# EAGLE board Client_Tally-NRF4 (EAGLE 7.1.0)
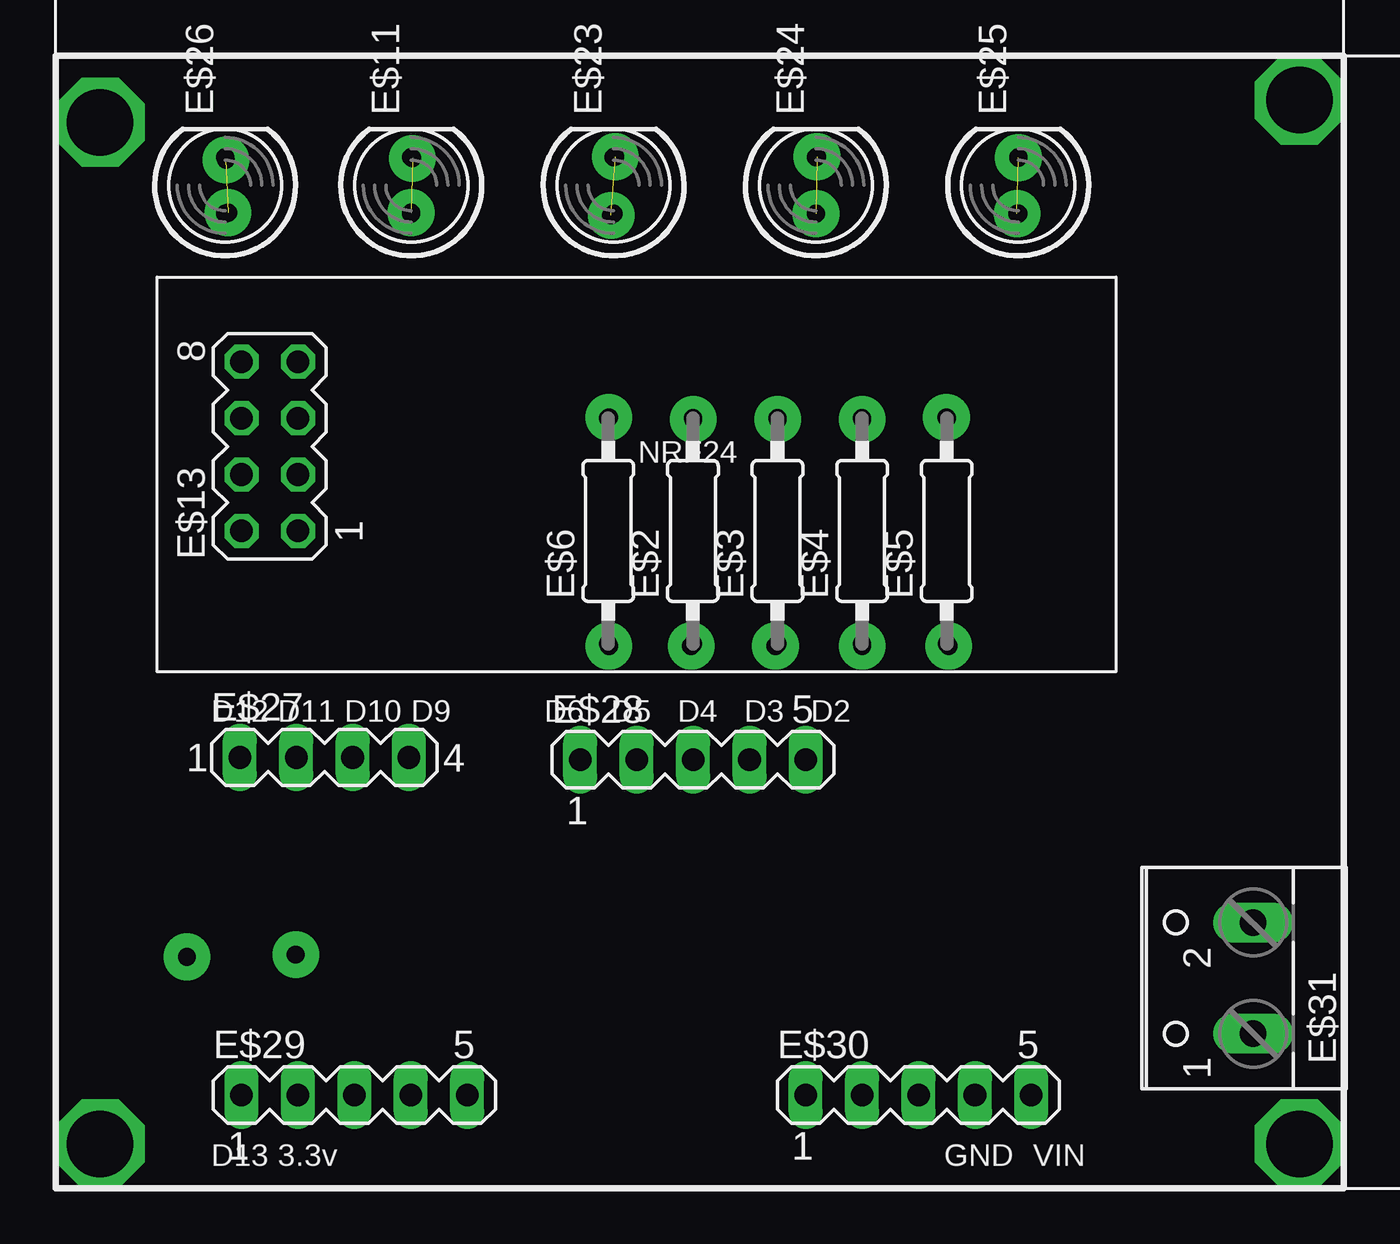
[diagram p0: board, top side]
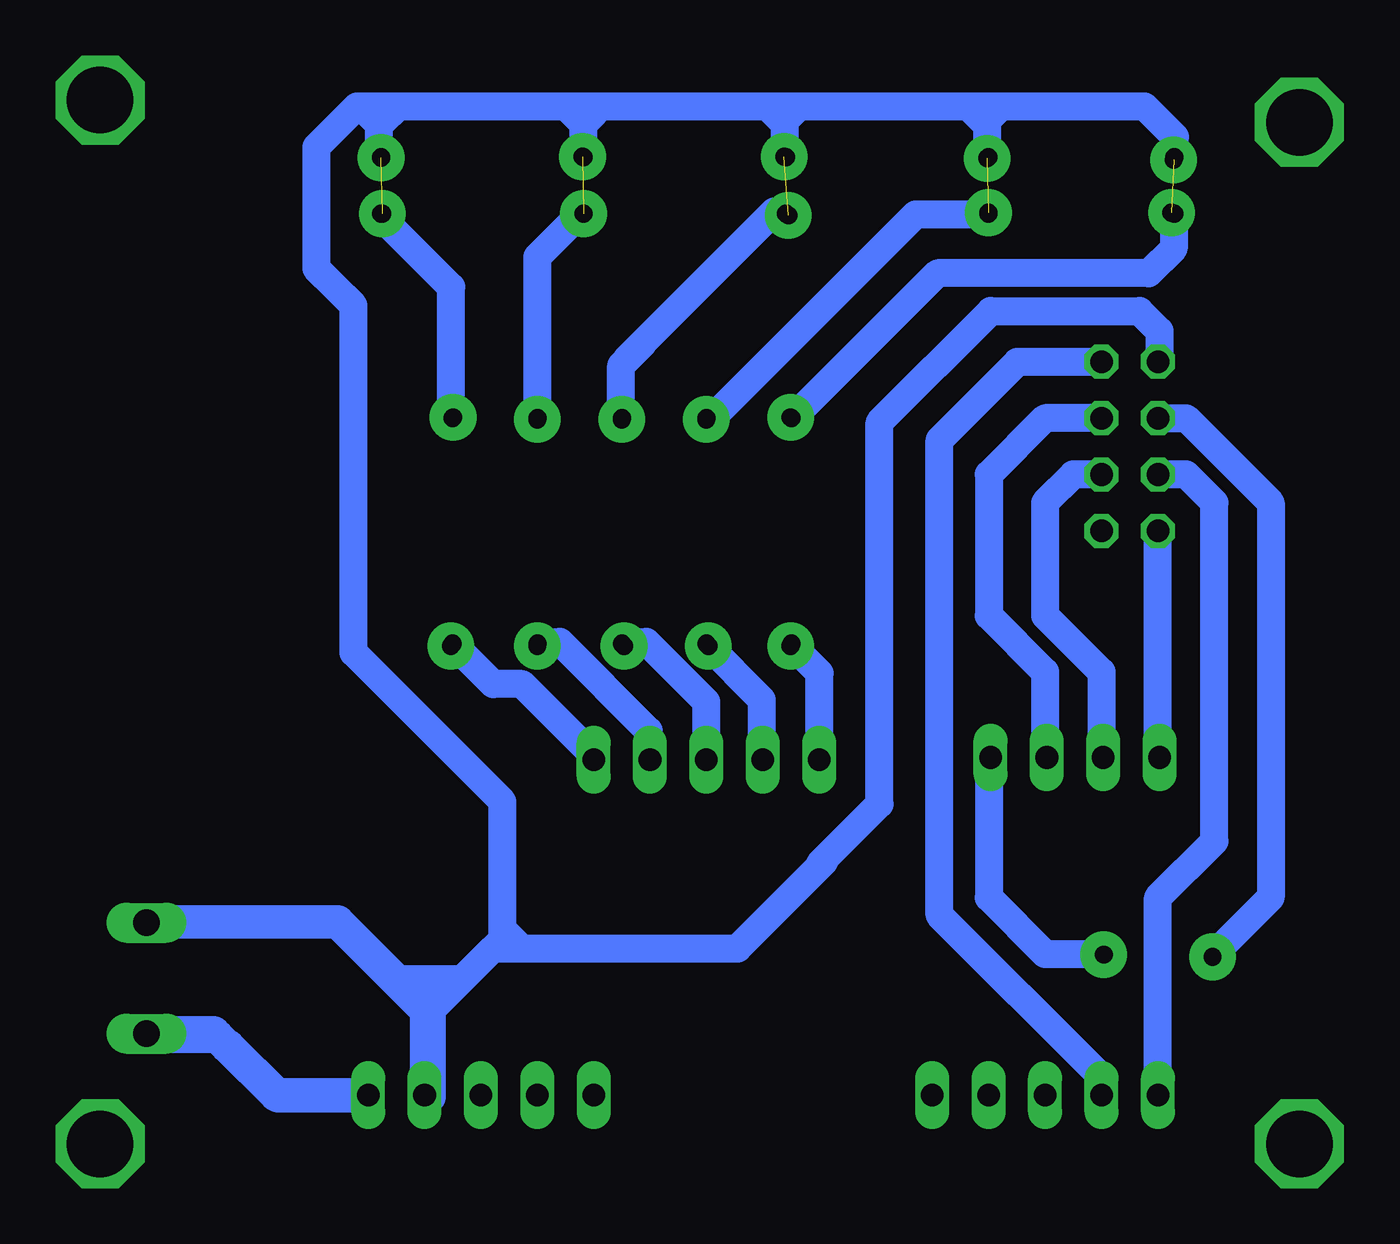
[diagram p1: board, bottom side, seen from below]

No outline drawn. Coordinates in mm, seen from the top.
Copper layers (1*16): Top 0.035mm / dielectric 1.5mm / Bottom 0.035mm
Design rules "default": minimum track width 10mil, minimum drill 24mil, track to track 8mil, track to pad 8mil, pad to pad 8mil, via to via 8mil, smd to smd 8mil, copper to edge 40mil, drill to drill 8mil, minimum pad ring 10mil, minimum via ring 8mil, stop-mask expansion 4mil, vias tented up to drill 0mil, thermal gap 10mil
Holes 0.6 mm at 464.65,47.98 462.65,49.48 466.15,56.98 462.65,58.98 461.15,52.48 461.15,61.48 491.15,57.48 484.65,40.48 414.65,42.03 412.65,43.53 416.15,51.03 412.65,53.03 411.15,46.53 411.15,55.53 441.15,51.53 434.65,34.53

## Footprints (pad centres in the part's own frame; a part is rotated, then mirrored left to right if it is on the bottom)
0207/10 = drill 0.813 octagon: 1 -5.08,0; 2 5.08,0
LED5MM = drill 0.813 octagon: A -1.27,0; K 1.27,0
MA04-2 = drill 1.016 octagon: 1 -3.81,-1.27; 2 -3.81,1.27; 3 -1.27,-1.27; 4 -1.27,1.27; 5 1.27,-1.27; 6 1.27,1.27; 7 3.81,-1.27; 8 3.81,1.27
MA04-1 = drill 1.016 long: 1 -3.81,0; 2 -1.27,0; 3 1.27,0; 4 3.81,0
MA05-1 = drill 1.016 long: 1 -5.08,0; 2 -2.54,0; 3 0,0; 4 2.54,0; 5 5.08,0
W237-102 = drill 1.194 long: 1 -2.5,-1.27; 2 2.5,-1.27

## Placement (x,y rotation side)
E$2  [0207/10]  29.69,30.6 90 top
E$3  [0207/10]  33.5,30.6 90 top
E$4  [0207/10]  37.31,30.6 90 top
E$5  [0207/10]  41.12,30.6 90 top
E$6  [0207/10]  25.88,30.6 90 top
E$11  [LED5MM]  17.01,46.16 90 top
E$13  [MA04-2]  10.64,34.41 90 top
E$23  [LED5MM]  26.12,46.16 90 top
E$24  [LED5MM]  35.23,46.16 90 top
E$25  [LED5MM]  44.34,46.16 90 top
E$26  [LED5MM]  8.63,46.16 90 top
E$27  [MA04-1]  13.1,20.4 0 top
E$28  [MA05-1]  29.7,20.3 0 top
E$29  [MA05-1]  14.45,5.2 0 top
E$30  [MA05-1]  39.85,5.2 0 top
E$31  [W237-102]  53.65,10.46 90 top

## Library data of the parts
E$2-E$6 = rcl
E$11 E$23-E$26 = led
E$13 E$27-E$30 = con-lstb
E$31 = con-wago-500

## Nets
S$1: E$13.3
S$2: E$13.5
S$3: E$13.2
S$130: E$13.4
S$173: E$13.6
S$204: E$13.7

## Tracks (layer width: path | path; a pad name or v marks a point on that pad's centre or on a via)
S$1
  Bottom 1.27: E$13.3 13.18,33.14 14.45,31.87 14.45,26.79 11.91,24.25 11.91,20.44
S$2
  Bottom 1.27: E$13.5 14.45,35.68 16.99,33.14 16.99,26.79 14.45,24.25 14.45,20.44
S$3
  Bottom 1.27: 9.37,20.44 E$13.2
S$5  (via drill 0.8 pad 2.1)
  other vias: 6.91,11.42
S$6  (via drill 0.8 pad 2.1)
  other vias: 11.81,11.52
S$7  (via drill 0.8 pad 2.1)
  other vias: 29.61,25.42
S$123  (via drill 0.8 pad 2.1)  (1 unrouted)
  other vias: 17,44.93 17.06,47.38
S$130
  Bottom 1.27: 9.37,5.2 9.37,14.09 6.83,16.63 6.83,31.87 8.1,33.14 E$13.4
S$173
  Bottom 1.27: E$13.6 8.1,35.68 4.29,31.87 4.29,14.09 6.83,11.55
S$196
  Bottom 1.27: 16.99,20.44 16.99,14.09 14.45,11.55 11.91,11.55
S$197
  Bottom 1.27: 12,5 12,6.1 19.2,13.3 19.2,34.7 15.7,38.2
S$198
  Bottom 1.27: 24.6,20.3 24.6,24.2 25.9,25.5
S$199
  Bottom 1.27: 27.2,20.5 27.2,23 29.7,25.5
S$200
  Bottom 1.27: 29.7,20.4 29.7,22.9 32.4,25.6 33.6,25.6
S$201
  Bottom 1.27: 34.9,20.6 38,23.7 39.3,23.7 41.1,25.5
S$202
  Bottom 1.27: 37.4,25.6 36.3,25.6 32.3,21.6 32.3,20.2
S$203
  Bottom 1.27: 42.3,5 42.3,8.8 39.3,11.8 28.3,11.8 24.6,15.5 | 24.6,15.5 24.4,15.7 | 24.6,15.5 24.6,15.6 21.9,18.3 21.9,35.5 16.9,40.5 10.2,40.5 9.3,39.6 9.3,38.2 9.4,38.1
S$204
  Bottom 1.27: 15.72,38.22 E$13.7
S$205
  Bottom 1.27: 8.66,44.98 8.66,43.32 9.78,42.2 19.29,42.2 25.86,35.63 25.86,35.66 25.82,35.7
S$206
  Bottom 1.27: 17.02,44.85 20.28,44.85 29.6,35.53
S$207
  Bottom 1.27: 26.13,44.98 26.65,44.98 33.34,38.29
S$208
  Bottom 1.27: 33.54,35.33 33.54,38.05 32.56,39.03
S$209
  Bottom 1.27: 37.31,35.46 37.31,42.95 35.31,44.95
S$210
  Bottom 1.27: 41.19,35.63 41.19,41.58 44.32,44.71
S$211
  Bottom 1.27: 38.88,11.91 38.88,18.41 45.59,25.12 45.59,40.76 47.27,42.42
S$212
  Bottom 1.27: 8.6,47.18 8.6,48.35 9.96,49.71 45.45,49.71 47.27,47.89 47.27,42.43 45.62,40.78
S$213
  Bottom 1.27: 35.23,47.36 35.23,49.48 35.29,49.54
S$214
  Bottom 1.27: 44.44,47.41 44.44,49.57
S$215
  Bottom 1.27: 26.17,47.22 26.17,49.51
S$216
  Bottom 1.27: 17.05,47.47 17.05,49.54 17.08,49.57
S$217
  Bottom 0.5: 17.48,48.72 17.48,48.74 18.07,49.33
S$218
  Bottom 0.5: 16.74,48.89 16.71,48.89 16.24,49.36
S$219
  Bottom 0.5: 26.66,48.89 26.68,48.89 27.13,49.34
S$220
  Bottom 0.5: 25.78,48.89 25.78,48.91 25.19,49.5
S$221
  Bottom 0.5: 35.61,48.79 35.64,48.79 36.35,49.5
S$222
  Bottom 0.5: 34.9,48.81 34.81,48.81 34.08,49.54
S$223
  Bottom 0.5: 44.8,48.65 44.8,48.71 45.56,49.47
S$224
  Bottom 0.5: 44.17,48.62 44.14,48.62 43.25,49.51
S$225
  Bottom 1.5: 45.16,5.2 49.08,5.2 51.28,7.4 | 51.28,7.4 51.73,7.85 | 51.73,7.85 55.16,7.85 55.36,8.05 55.36,8.01 51.89,8.01 51.73,7.85 | 51.28,7.4 51.23,7.4 48.99,5.16 45.28,5.16
S$226
  Bottom 1.5: 54.91,12.99 46.3,12.99 42.18,8.87 42.18,5.11 42.34,4.95
S$227
  Bottom 1.5: 42.3,4.95 42.3,9.12 42.42,9.24
S$228
  Bottom 0.6: 37.69,11.88 37.69,11.94 38.72,12.97 38.72,12.85 39.87,11.7
S$229
  Bottom 0.6: 40.64,10.74 42.62,10.74 | 43.77,10.74 42.62,10.74 | 42.62,10.74 42.03,10.15
S$230
  Bottom 0.6: 41.69,10.4 40.98,10.4 40.82,10.56 41.73,10.56 41.94,10.35
S$231  (via drill 3 pad 3)
  other vias: 3,49
S$232  (via drill 3 pad 3)
  other vias: 3,3
S$233  (via drill 3 pad 3)
  other vias: 57,3
S$234  (via drill 3 pad 3)
  other vias: 57,50
S$235  (via drill 0.8 pad 2.1)
  other vias: 25.91,35.72
S$236  (via drill 0.8 pad 2.1)
  other vias: 29.71,35.62
S$237  (via drill 0.8 pad 2.1)
  other vias: 33.51,35.62
S$238  (via drill 0.8 pad 2.1)
  other vias: 41.11,35.72
S$239  (via drill 0.8 pad 2.1)
  other vias: 37.31,35.62
S$240  (via drill 0.8 pad 2.1)
  other vias: 41.21,25.42
S$241  (via drill 0.8 pad 2.1)
  other vias: 33.41,25.42
S$242  (via drill 0.8 pad 2.1)
  other vias: 25.91,25.42
S$243  (via drill 0.8 pad 2.1)
  other vias: 37.31,25.42
S$244  (via drill 0.8 pad 2.1)  (1 unrouted)
  other vias: 44.35,47.41 44.29,44.89
S$245  (via drill 0.8 pad 2.1)  (1 unrouted)
  other vias: 35.28,47.45 35.23,44.89
S$246  (via drill 0.8 pad 2.1)  (1 unrouted)
  other vias: 26.2,47.45 26.01,44.81
S$247  (via drill 0.8 pad 2.1)  (1 unrouted)
  other vias: 8.66,47.31 8.76,44.93

## Text on the board
tPlace: D12 | D11 | D10 | D9 | D6 | D5 | D4 | D3 | D2 | D13 | 3.3v | GND | VIN
tNames: NRF24